# Altium PCB BluetoothHC05.PcbDoc
Units mm, origin at the board's own origin, x right, y up, seen from the top; angles counter-clockwise.
Board outline 40 x 40 mm, 4 copper layers (Top Layer, Internal Plane 1, Internal Plane 2, Bottom Layer), stack 0.462 mm thick; 22 components, 20 nets, 120 pads, 16 vias.
Unrouted connection lines stored in the file: 50.
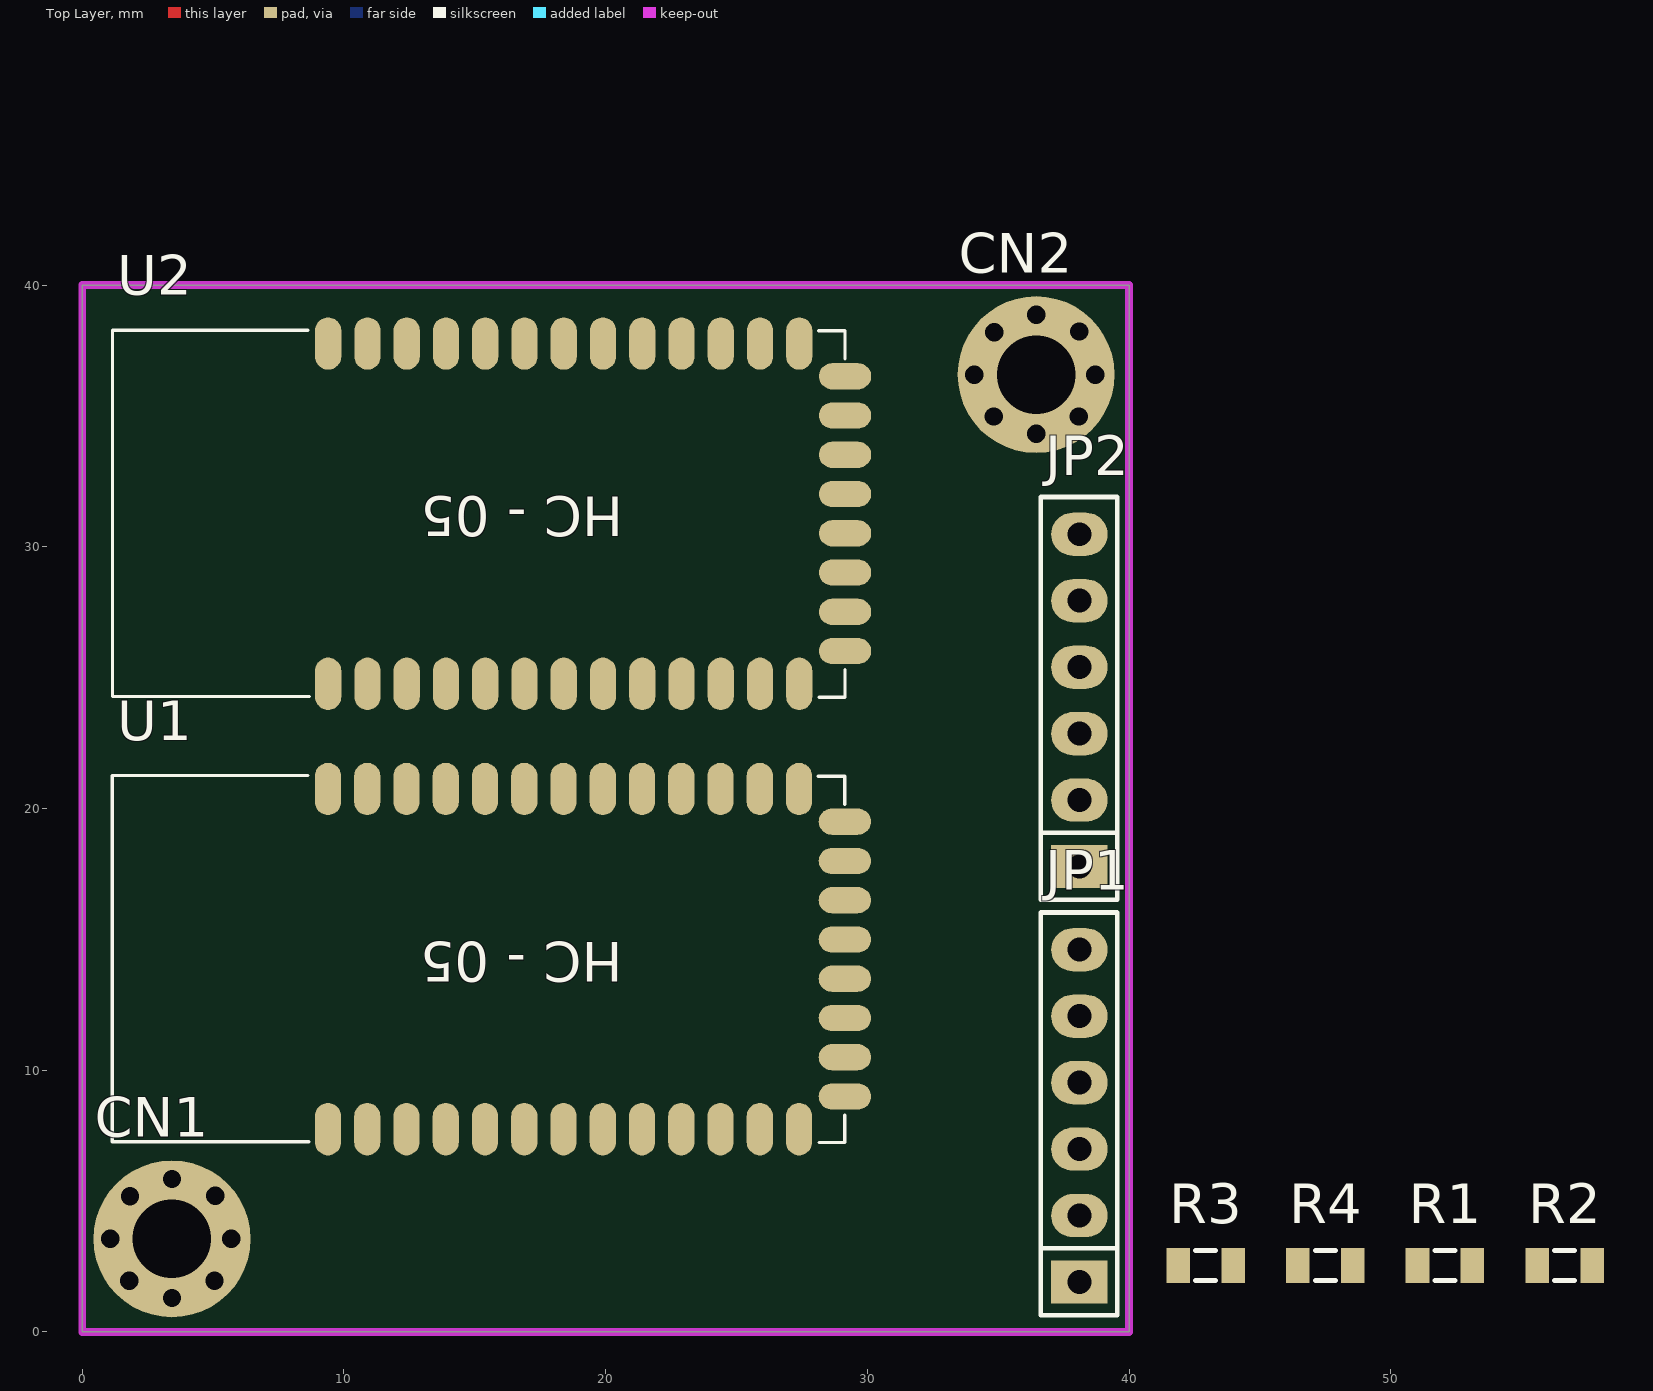
[diagram p0: Top Layer view]
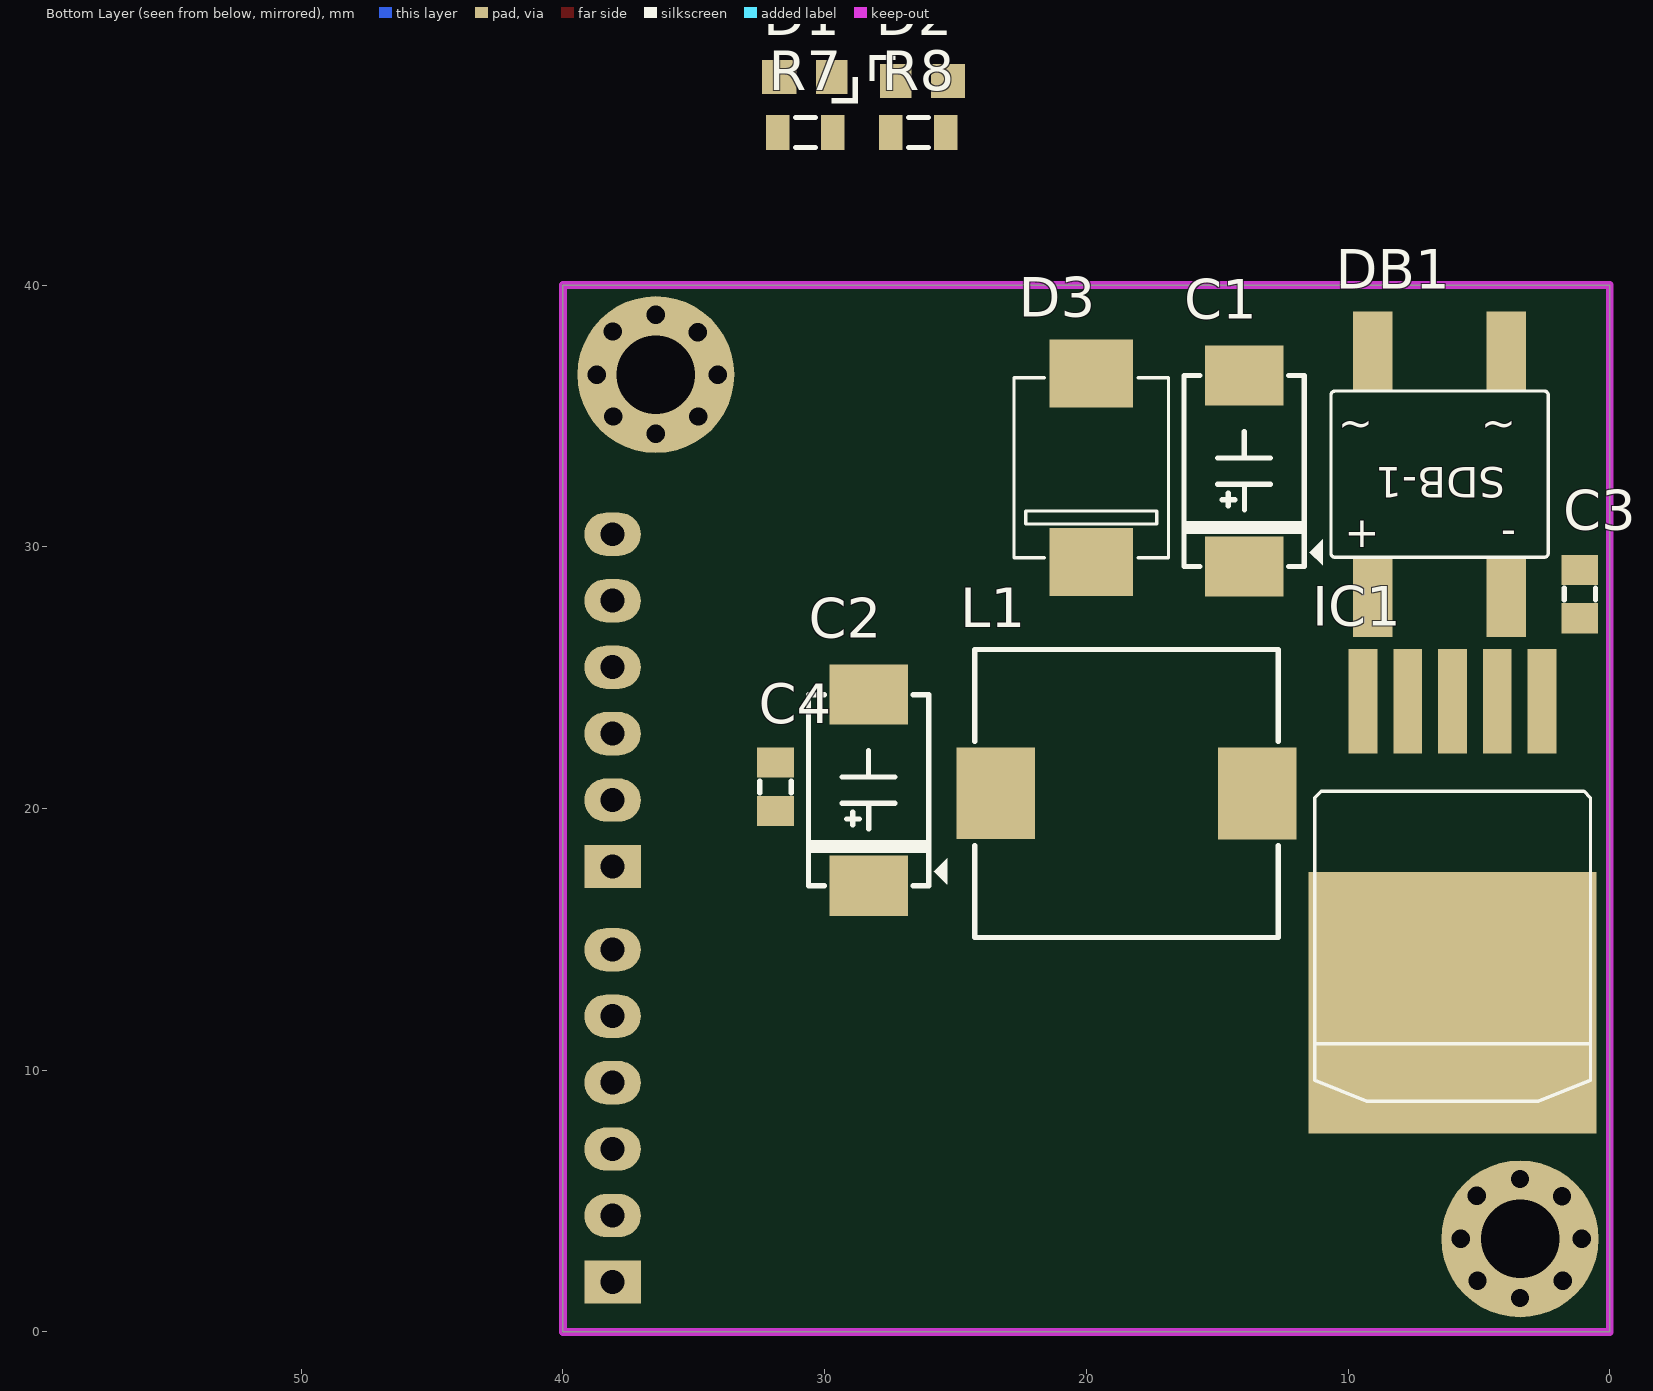
[diagram p1: Bottom Layer view, seen from below]
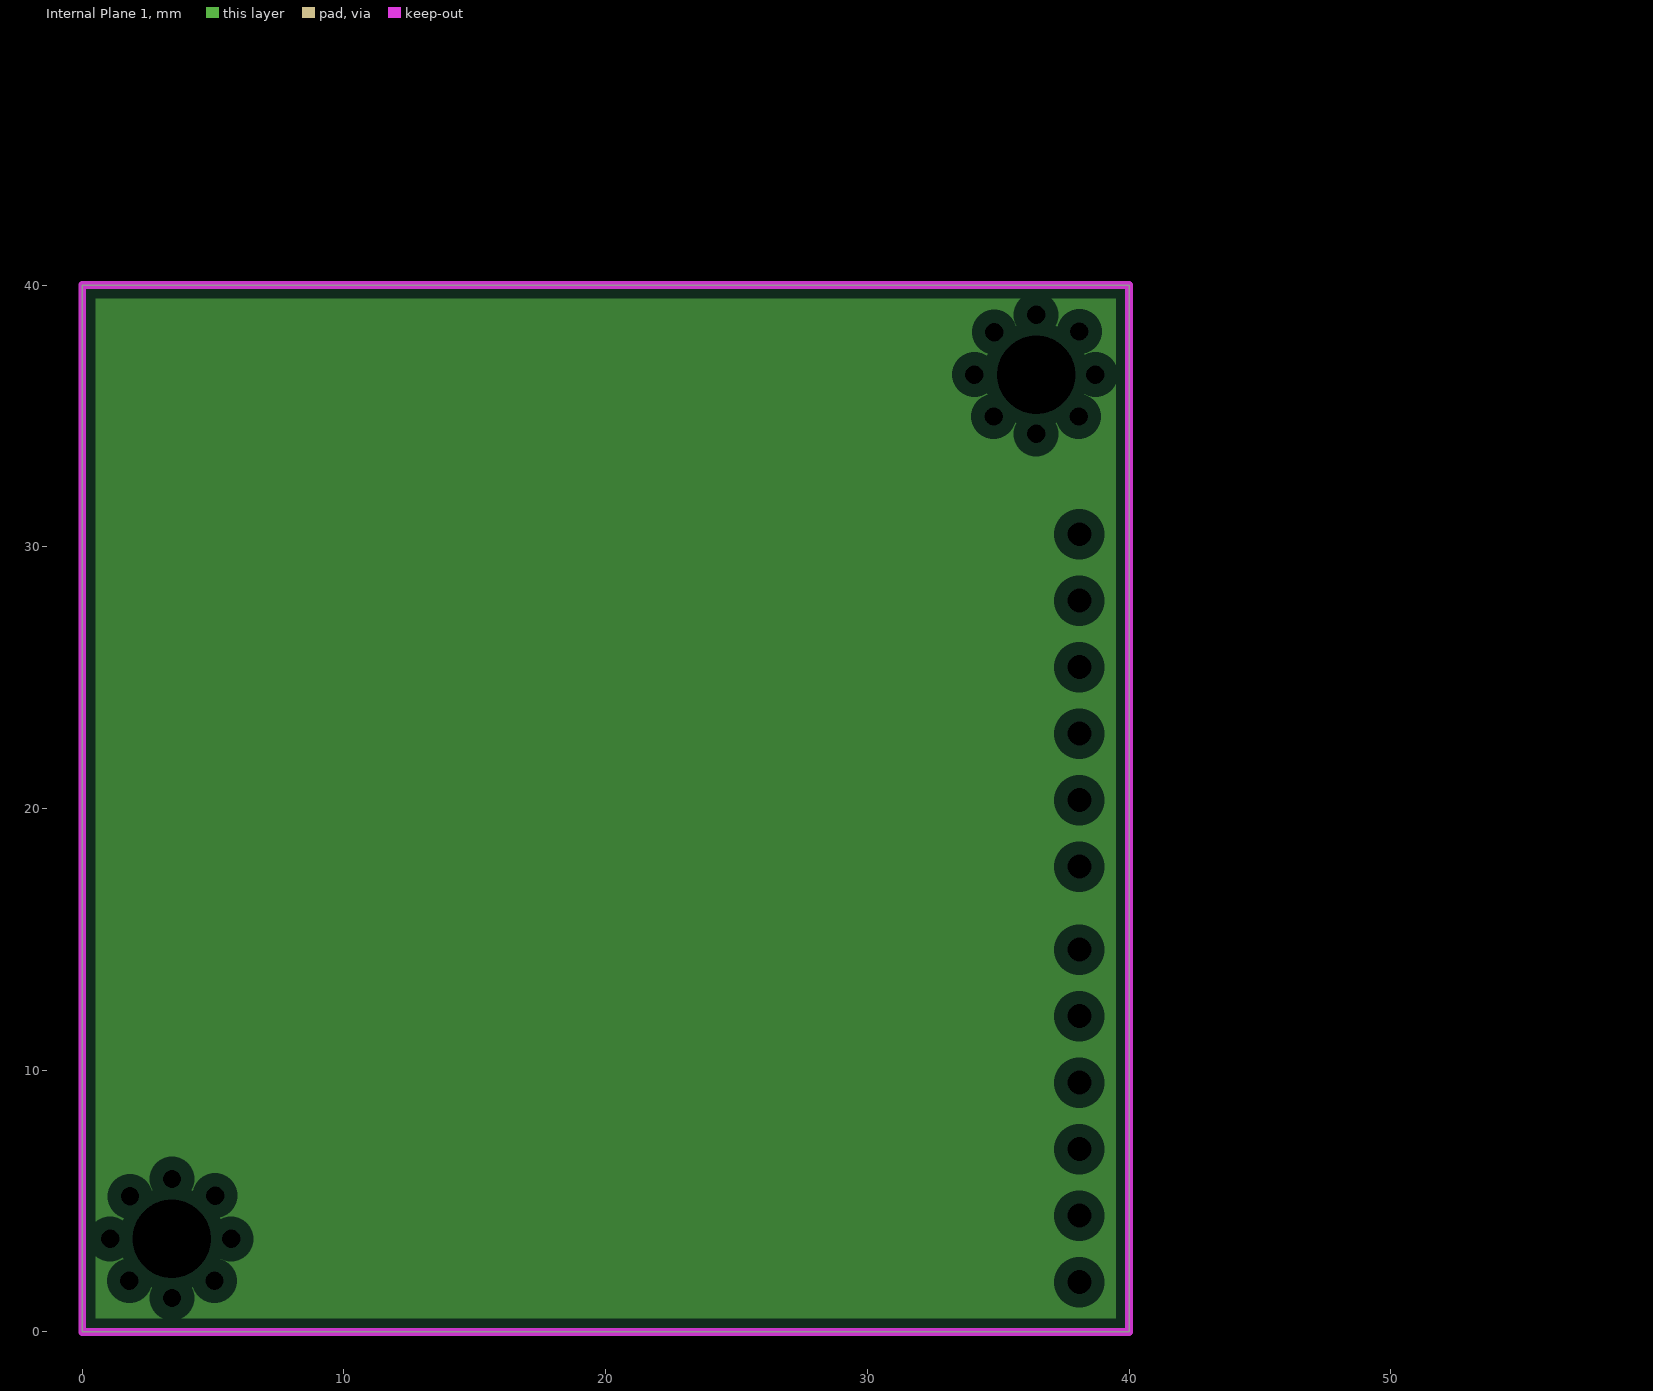
[diagram p2: Internal Plane 1, clearances drawn from the general rule]
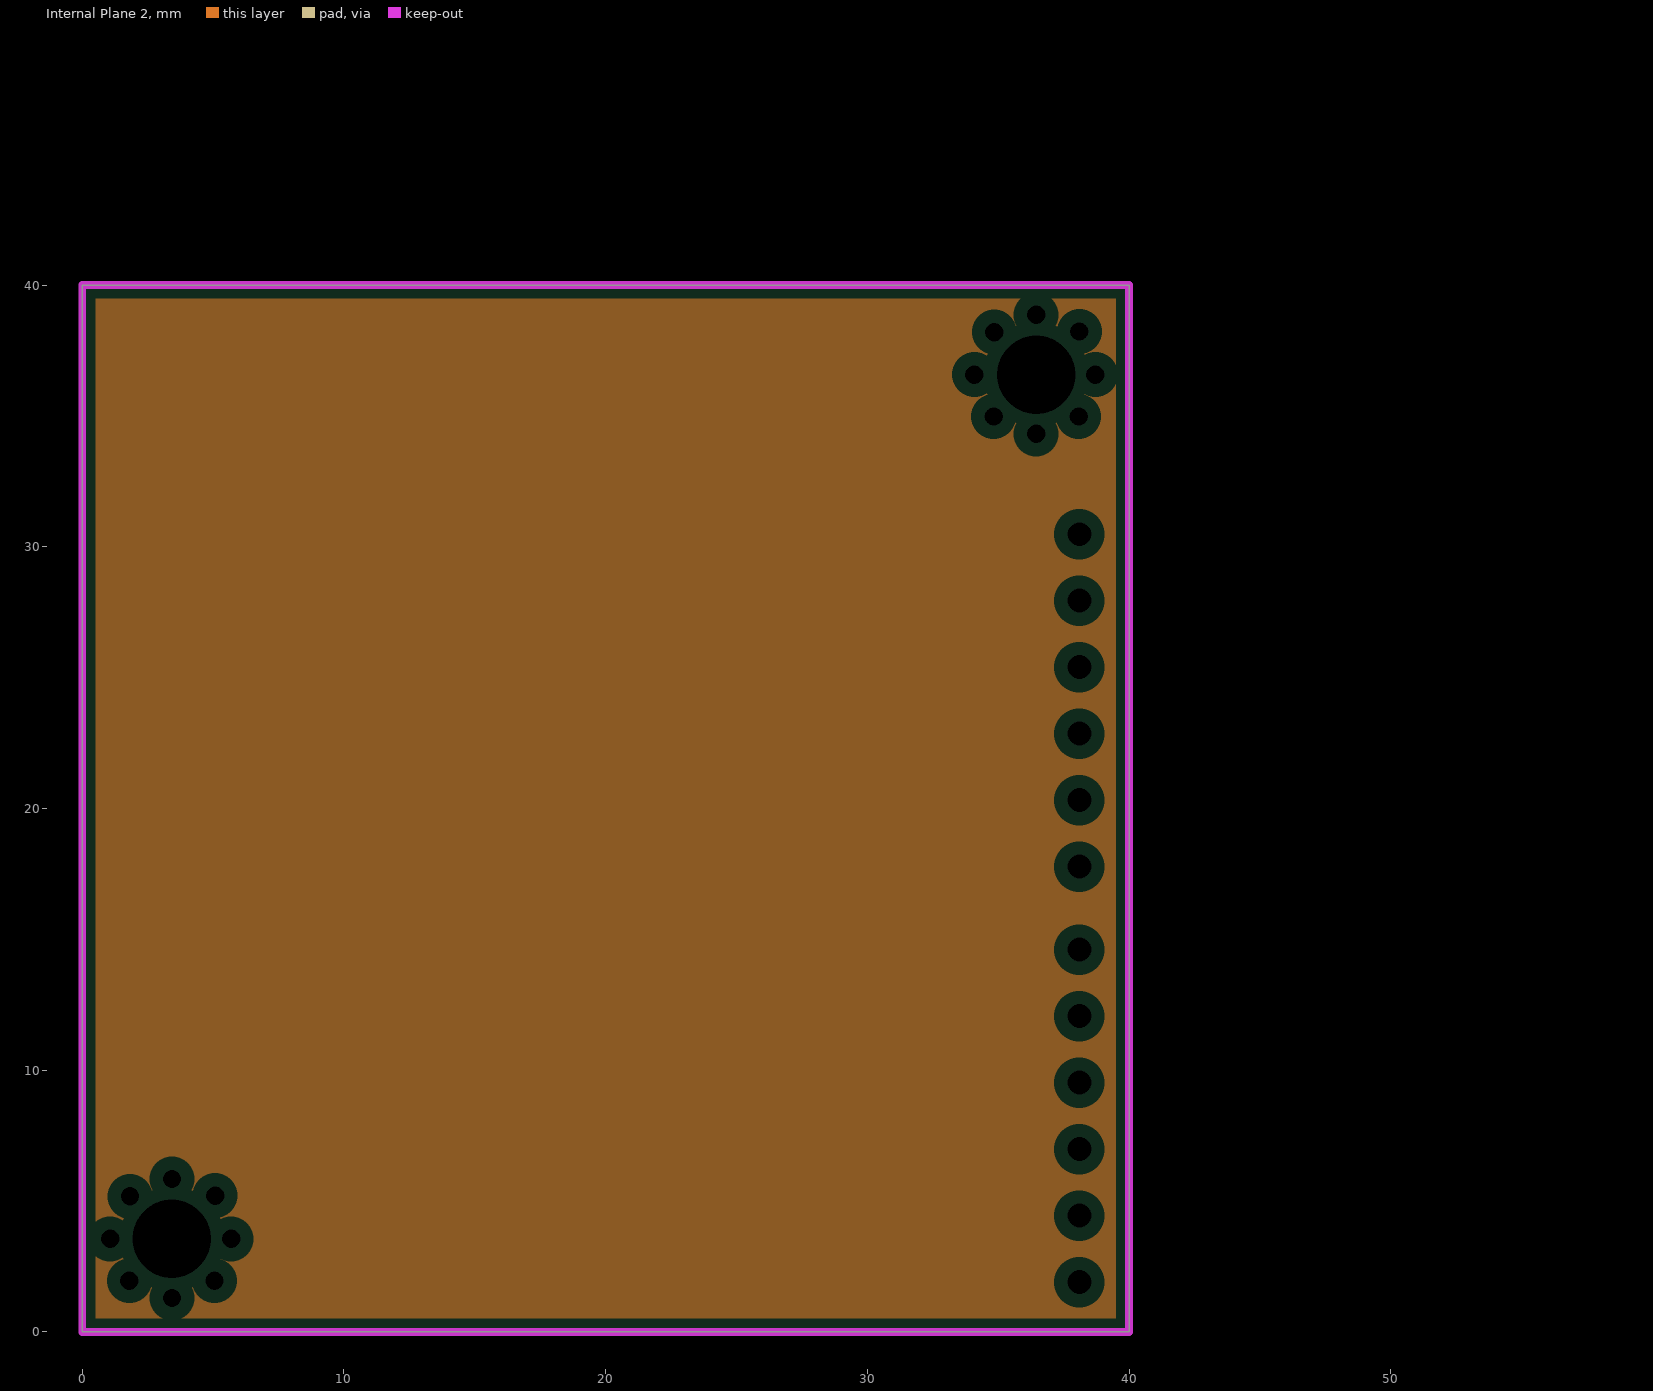
[diagram p3: Internal Plane 2, clearances drawn from the general rule]

## Layer stack, top to bottom
Top Solder: solder mask 0.0102, Solder Resist, Dk 3.5
Top Layer: signal copper 0.0356
Internal Plane 1: plane copper 0.0356
Internal Plane 2: plane copper 0.0356
Dielectric 1: dielectric 0.32, FR-4, Dk 4.8
Bottom Layer: signal copper 0.0356
Bottom Solder: solder mask 0.0102, Solder Resist, Dk 3.5

## Board outline
0,0 0,40 40,40 40,0

## Design rules (kind name [scope] priority, off if disabled: settings)
Clearance [All] p1: gap=0.2
PlaneClearance [All] p1: clearance=0.508
PlaneConnect [All] p1: planeconnectstyle=Relief reliefexpansion=0.508 reliefentries=4 reliefconductorwidth=0.254 reliefairgap=0.254
PolygonConnect [All] p1: connectstyle=Relief reliefconductorwidth=0.254 reliefentries=4 polygonreliefangle="90 Angle" airgapwidth=0.254
RoutingVias [All] p1: holewidth=0.6 width=1 viastyle="Through Hole" minholewidth=0.711 minwidth=1.27 maxholewidth=0.711 maxwidth=1.27
SolderMaskExpansion [All] p1: expansion=0.102
Width [All] p1: maxlimit=0.2 minlimit=0.2 preferedwidth=0.2
28 further rules are at their usual default settings.

## Components (designator, comment, footprint, x,y, rotation, side; value= is the part's Value field where it differs from the comment)
C1 "470uF" C-TANT-7343-31-CASEA 13.97,32.893 r90 bottom
C2 "470uF" C-TANT-7343-31-CASEA 28.321,20.701 r90 bottom
C3 "104" C-0805 1.143,28.194 r270 bottom
C4 "104" C-0805 31.877,20.828 r270 bottom
CN1 "VIN1" M3 3.429,3.556 r0 top
CN2 "VIN2" M3 36.449,36.576 r0 top
D1 "LED" LED-0805 30.734,47.942 r180 bottom
D2 "LED" LED-0805 26.289,47.792 r0 bottom
D3 "1N5822" D-DO214-AB 19.812,33.02 r180 bottom
DB1 "Diode Brideg" D-DB-1A-SMD 6.502,32.774 r0 bottom
IC1 "LM2576 3V3" TO-263-5L 6.008,18.338 r0 bottom
JP1 "HC05-1" JP6 38.1,1.905 r90 top
JP2 "HC05-2" JP6 38.1,17.78 r90 top
L1 "150mH" L-SMD-10x10 18.465,20.574 r0 bottom
R1 "680R" R-0805 52.07,2.54 r0 top
R2 "680R" R-0805 56.642,2.54 r0 top
R3 "1.2K" R-0805 42.926,2.54 r0 top
R4 "1.2K" R-0805 47.498,2.54 r0 top
R7 "220R" R-0805 30.734,45.827 r0 bottom
R8 "220R" R-0805 26.416,45.827 r180 bottom
U1 "HC05" LV-BC-2.0 29.141,7.747 r90 top
U2 "HC05" LV-BC-2.0 29.148,24.765 r90 top

## Footprints (in the part's own frame and the unit in brackets; to place one, negate y for a bottom-side part, rotate by r counter-clockwise, add the part's x,y. Pads: shape width x height; smd on the part's side, far side on the other; paste and mask are expansions set on the pad)
C-0805 [mm] "Chip Capacitor, 2-Leads, Body 2.0x1.3mm, IPC Medium Density"
  rect 1.15x1.4 smd: 1(-0.925,0) 2(0.925,0)
  silkscreen extent -0.22,-0.6 0.23,0.6, body extent -1,-0.63 1,0.62, height 0.5
C-TANT-7343-31-CASEA [mm] "Tantalium Capacitor 7343-31"
  rect 2.3x3 smd: 1(-3.65,0) 2(3.65,0)
  silkscreen extent -3.65,-3 3.65,2.3, body extent -3.79,-2.3 3.81,2.3, height 3.1
D-DB-1A-SMD [mm] "DB106S"
  rect 1.5x3 smd: 1(-2.55,-4.713) 2(2.55,-4.713) 3(2.55,4.713) 4(-2.55,4.713)
  silkscreen extent -4.15,-3.18 4.15,3.18, body extent -4.15,-4.95 4.15,4.95, height 3.35
D-DO214-AB [mm]
  rect 3.2x2.6 smd: 1(0,3.6) 2(0,-3.6)
  silkscreen extent -2.95,-3.44 2.95,3.44, body extent -2.95,-3.81 2.95,3.82, height 2.4
JP6 [mil] "JP6"
  rect 65x85 hole 36: 1(0,0)
  oval 65x85 hole 36: 2(100,0) 3(200,0) 4(300,0) 5(400,0) 6(500,0)
  silkscreen extent -50,-57 556,58, body extent -48,-50 548,48, height 323
L-SMD-10x10 [mm] "SMD Inductor X-Size = Y-Size = 10mm"
  rect 3x3.5 smd: 1(-5,0) 2(5,-0.015)
  silkscreen extent -5.8,-5.5 5.8,5.5, body extent -5.61,-5.51 5.59,5.49, height 4.05
LED-0805 [mm]
  rect 1.3x1.3 smd: 1(-1,0)
  rect 1.2x1.3 smd: 2(1,0)
  silkscreen extent 1,-1 2,0, body extent -1.01,-0.63 1.01,0.62, height 1.1
LV-BC-2.0 [mm]
  oval 2x1 smd: 1(0,19.75) 2(0,18.25) 3(0,16.75) 4(0,15.25) 5(0,13.75) 6(0,12.25) 7(0,10.75) 8(0,9.25) 9(0,7.75) 10(0,6.25) 11(0,4.75) 12(0,3.25) 13(0,1.75) 22(13,1.75) 23(13,3.25) 24(13,4.75) 25(13,6.25) 26(13,7.75) 27(13,9.25) 28(13,10.75) 29(13,12.25) 30(13,13.75) 31(13,15.25) 32(13,16.75) 33(13,18.25) 34(13,19.75)
  oval 1x2 smd: 14(1.25,0) 15(2.75,0) 16(4.25,0) 17(5.75,0) 18(7.25,0) 19(8.75,0) 20(10.25,0) 21(11.75,0)
  silkscreen extent -0.51,0 13.51,27.99, body extent -0.51,0 13.51,28.01, height 2.35
M3 [mm]
  round 6 hole 3: 1(0,0)
R-0805 [mm] "Chip Resistor, 2-Leads, Body 2.0x1.3mm, IPC Medium Density"
  rect 0.9x1.35 smd: 1(-1.05,0) 2(1.05,0)
  silkscreen extent -0.38,-0.58 0.38,0.58, body extent -1,-0.63 1,0.63, height 0.5
TO-263-5L [mm]
  rect 1.1x4 smd: 1(-3.42,-5.765) 2(-1.71,-5.765) 3(0,-5.765) 4(1.71,-5.765) 5(3.42,-5.765)
  rect 11x10 smd: HM(0,5.765)
  silkscreen extent -5.27,-2.33 5.27,9.52, body extent -5.27,-6.3 5.27,9.52, height 4.95

## Part data
C1 C2: library part CP1, "Cap P  0,1uF < 22uF , 16 - 50V"
C3 C4: library part CN
CN1 CN2: library part COCDONGM3
D1 D2: "LED Single colour Green and Red"
D3: library part D1A, "Diode 1A"
DB1: library part DB, "Convert AC to DC voltage, 4 pin"
IC1: library part LM2576, "LM2576"
JP1 JP2: library part JP6, "JP6 PIN"
L1: library part L1, "Inductor"
R1 R2 R3 R4 R7 R8: library part R, "Resistor 1/4W"

## Via types
v1: diameter 1, hole 0.7, Top Layer to Bottom Layer, 16 vias

## Nets (pads, with @x,y where several pads share a name; then routed paths per layer and width w, separated by ;. In a path a pad name is that pad's centre, name@x,y a point inside that pad or via, vN(x,y) a via of type N, cw(c..) or ccw(c..) an arc to the next point about the centre after c; other vN are vias at no path point)
+3V3: C2.1 C4.2 IC1.4 JP1.2 JP2.2 L1.2 U1.12 U2.12
+12V: C1.1 C3.2 DB1.3 IC1.1
GND: C1.2 C2.2 C3.1 C4.1 D1.2 D2.2 D3.1 DB1.4 IC1.3 IC1.5 IC1.HM JP1.1 JP2.1 R3.1 R4.1 U1.13 U1.21 U1.22 U2.13 U2.21 U2.22
KEY1: JP1.4 U1.34
KEY2: JP2.4 U2.34
LED1-1: R7.2 U1.31
LED1-2: R8.2 U2.31
LED2-1: JP1.3 U1.32
LED2-2: JP2.3 U2.32
NetCN1_1: CN1.1 DB1.2
  other v1: 3.429,1.295 1.803,1.956 5.055,1.956 1.067,3.556 5.69,3.556 1.829,5.182 5.08,5.207 3.429,5.842
NetCN2_1: CN2.1 DB1.1
  other v1: 36.449,34.315 34.823,34.976 38.075,34.976 34.087,36.576 38.71,36.576 34.849,38.202 38.1,38.227 36.449,38.862
NetD1_1: D1.1 R7.1
NetD2_1: D2.1 R8.1
NetD3_2: D3.2 IC1.2 L1.1
NetR1_1: R1.1 R3.2 U1.2
NetR2_1: R2.1 R4.2 U2.2
"UART RX1": JP1.5 R1.2
"UART RX2": JP2.5 R2.2
"UART TX1": JP1.6 U1.1
"UART TX2": JP2.6 U2.1
pads on no net: U1.3 U1.4 U1.5 U1.6 U1.7 U1.8 U1.9 U1.10 U1.11 U1.14 U1.15 U1.16 U1.17 U1.18 U1.19 U1.20 U1.23 U1.24 U1.25 U1.26 U1.27 U1.28 U1.29 U1.30 U1.33 U2.3 U2.4 U2.5 U2.6 U2.7 U2.8 U2.9 U2.10 U2.11 U2.14 U2.15 U2.16 U2.17 U2.18 U2.19 U2.20 U2.23 U2.24 U2.25 U2.26 U2.27 U2.28 U2.29 U2.30 U2.33

## Keep-outs
Keep-Out Layer:
  the board outline again, w0.3

## Text inside footprints (layer, text, board x,y; h text height)
DB1: Bottom Overlay "~        ~" at 3.581,35.568 h2 r180; Bottom Overlay "-         +" at 3.581,31.377 h2 r180; Bottom Overlay "SDB-1" at 3.995,33.414 h2 r180
U1: Top Overlay "HC - 05" at 20.657,14.884 h1.52 r180
U2: Top Overlay "HC - 05" at 20.664,31.902 h1.52 r180